# Altium PCB sensor_flex_v2.PcbDoc
Units mil, origin at the board's own origin, x right, y up, seen from the top; angles counter-clockwise.
Board outline 6000 x 990 mil, 2 copper layers (Top Layer, Bottom Layer); 1 components, 1 nets, 16 pads, 0 vias.
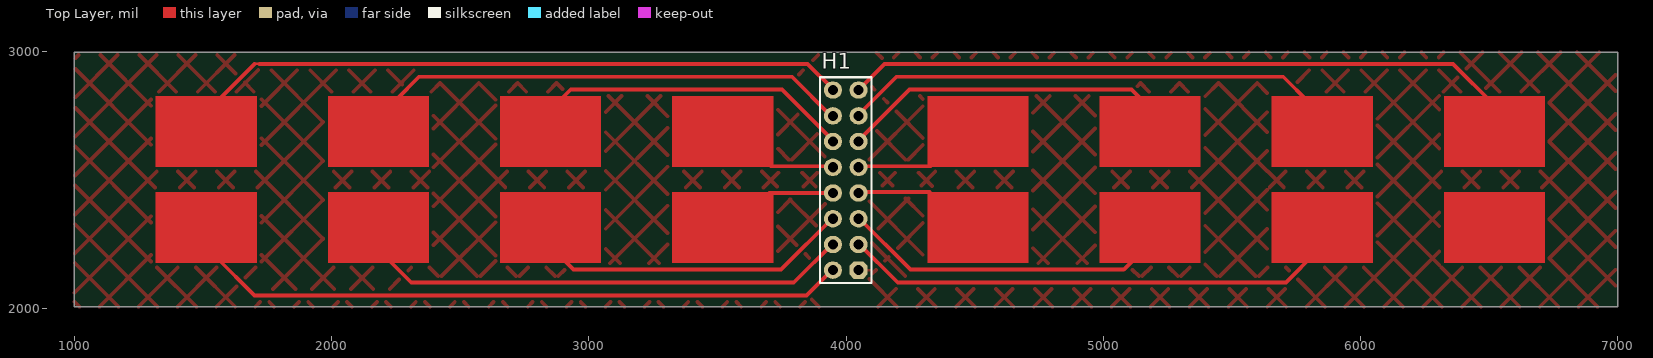
[diagram p0: Top Layer view]
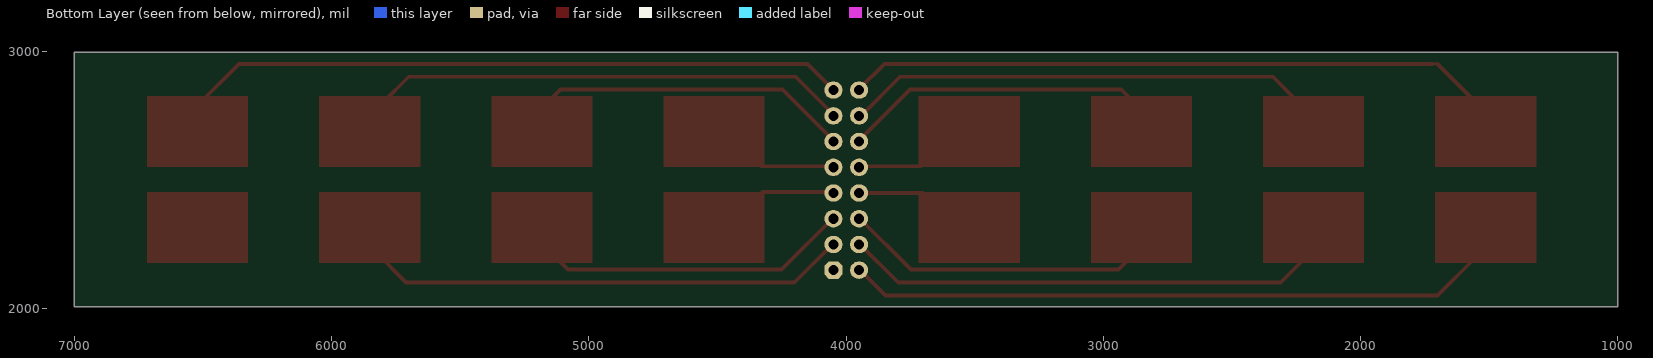
[diagram p1: Bottom Layer view, seen from below]

## Layer stack, top to bottom
Top Solder: solder mask 0.4, Solder Resist, Dk 3.5
Top Layer: signal copper 1.4
Dielectric 1: dielectric 12.6, FR-4, Dk 4.8
Bottom Layer: signal copper 1.4
Bottom Solder: solder mask 0.4, Solder Resist, Dk 3.5

## Board outline
1000,2005 7000,2005 7000,2995 1000,2995
board region Edge-2: 6994.13,2995 7000,2995 7000,2005 6991,2005
board region Flex: 6991,2005 1005,2005 1004.91,2995 6994.13,2995
board region Edge-1: 1005,2005 1000,2005 1000,2995 1004.91,2995

## Design rules (kind name [scope] priority, off if disabled: settings)
Clearance [All] p1: gap=10 ignorepadtopadclearanceinfootprint=FALSE except(0: Arc-Hole Track-Hole SMDPad-Hole THPad-Hole Via-Hole Fill-Hole Poly-Hole Region-Hole Text-Hole)
PolygonConnect [All] p1: connectstyle=Relief reliefconductorwidth=10 reliefentries=4 polygonreliefangle="90 Angle" airgapwidth=10
RoutingVias [All] p1: holewidth=28 width=50 viastyle="Through Hole" minholewidth=28 minwidth=50 maxholewidth=28 maxwidth=50
SolderMaskExpansion [All] p1: expansion=4
Width [All] p1: maxlimit=15 minlimit=10 preferedwidth=10
30 further rules are at their usual default settings.

## Components (designator, comment, footprint, x,y, rotation, side; value= is the part's Value field where it differs from the comment)
H1 "HEADER" HD_male_8x2_100mil_straight 3999,2498 r90 top

## Footprints (in the part's own frame and the unit in brackets; to place one, negate y for a bottom-side part, rotate by r counter-clockwise, add the part's x,y. Pads: shape width x height; smd on the part's side, far side on the other; paste and mask are expansions set on the pad)
HD_male_8x2_100mil_straight [mm]
  oct 1.7x1.8 hole 1: 1(-8.89,-1.27)
  oval 1.7x1.8 hole 1: 2(-8.89,1.27) 3(-6.35,-1.27) 4(-6.35,1.27) 5(-3.81,-1.27) 6(-3.81,1.27) 7(-1.27,-1.27) 8(-1.27,1.27) 9(1.27,-1.27) 10(1.27,1.27) 11(3.81,-1.27) 12(3.81,1.27) 13(6.35,-1.27) 14(6.35,1.27) 15(8.89,-1.27) 16(8.89,1.27)
  Mechanical 15 keep-out lines w0.1: -10.16,2.54 10.16,2.54 10.16,-2.54 -10.16,-2.54 -10.16,2.54
  silkscreen extent -10.16,-2.54 10.16,2.54, body extent -10.16,-2.54 10.16,2.54, height 8

## Part data
H1: library part HD_8x2, "Header, 8-pins/row, double row,"

## Nets (pads, with @x,y where several pads share a name; then routed paths per layer and width w, separated by ;. In a path a pad name is that pad's centre, name@x,y a point inside that pad or via, vN(x,y) a via of type N, cw(c..) or ccw(c..) an arc to the next point about the centre after c; other vN are vias at no path point)
GND: H1.1
pads on no net: H1.2 H1.3 H1.4 H1.5 H1.6 H1.7 H1.8 H1.9 H1.10 H1.11 H1.12 H1.13 H1.14 H1.15 H1.16
copper on no net: | length 20721.9
  Top Layer w10: 1700,2950 1720,2950 ; 2890,2820 2900,2820 ; 4049,2852 4052,2852 ; 4326,2620 4340,2620
  Top Layer w15: 1550,2200 1700,2050 3800,2050 3847,2050 3949,2152 ; 1560,2810 1700,2950 ; 1720,2950 1740,2950 3800,2950 ; 2210,2200 2310,2100 3750,2100 3797,2100 3949,2252 ; 2250,2810 2340,2900 3750,2900 3790,2900 3940,2750 ; 2890,2200 2940,2150 3720,2150 3747,2150 3949,2352 ; 2900,2820 2930,2850 3730,2850 3751,2850 3949,2652 ; 3702,2448 3808.75,2448 3902.25,2448 3949,2448 ; 3709,2552 3949,2552 ; 3799,2950 3851,2950 3949,2852 ; 4049,2252 4201,2100 4240,2100 5710,2100 5830,2220 ; 4049,2352 4251,2150 4270,2150 5080,2150 5140,2210 ; 4049,2452 4258,2452 4325,2452 ; 4049,2552 4328,2552 ; 4049,2652 4247,2850 4270,2850 5110,2850 5150,2810 ; 4049,2752 4197,2900 4240,2900 5700,2900 5800,2800 ; 4052,2852 4150,2950 6360,2950 6520,2790

## Polygon pours and split planes (outlines as drawn)
GND on Top Layer "Top Layer-No Net" (hatched 45Degree grid 107 track 15, pour order 14): 4081,2993 4081,2006 6992,2006 6994,2008 6992,2010 6992,2994
GND on Top Layer "Top Layer-No Net" (hatched 45Degree grid 107 track 15, pour order 10): 1005,2988 1009,2984 3925,2984 3925,2011 3920,2006 1001,2006

## Other copper
Top Layer:
  rectangle: 2654.68,2548.68 3048.38,2824.27
  rectangle: 3323.97,2548.68 3717.67,2824.27
  rectangle: 1985.39,2548.68 2379.09,2824.27
  rectangle: 1316.09,2548.68 1709.8,2824.27
  rectangle: 1316.09,2176.24 1709.8,2451.83
  rectangle: 1985.39,2176.24 2379.09,2451.83
  rectangle: 3323.97,2176.24 3717.67,2451.83
  rectangle: 2654.68,2176.24 3048.38,2451.83
  rectangle: 5654.68,2176.24 6048.38,2451.83
  rectangle: 6323.97,2176.24 6717.67,2451.83
  rectangle: 4985.39,2176.24 5379.09,2451.83
  rectangle: 4316.09,2176.24 4709.8,2451.83
  rectangle: 4316.09,2548.68 4709.8,2824.27
  rectangle: 4985.39,2548.68 5379.09,2824.27
  rectangle: 6323.97,2548.68 6717.67,2824.27
  rectangle: 5654.68,2548.68 6048.38,2824.27